# EAGLE board Copy of Super Hango (EAGLE 9.7.0)

Size 259.28 x 146.26 mm. Coordinates in mm from the lower left corner, seen from the top.
Outline: 0,0 259.28,0 259.28,146.26 0,146.26 0,0
Copper layers (1*16): Top 0.035mm / dielectric 1.5mm / Bottom 0.035mm
Design rules "default": minimum track width 6mil, minimum drill 0.35mm, track to track 6mil, track to pad 6mil, pad to pad 6mil, via to via 6mil, smd to smd 6mil, copper to edge 40mil, drill to drill 6mil, minimum pad ring 10mil, minimum via ring 8mil, stop-mask expansion 4mil, vias tented up to drill 0mil, thermal gap 10mil

## Footprints (pad centres in the part's own frame; a part is rotated, then mirrored left to right if it is on the bottom)
DIODE-AXIAL = drill 1: 1 -5.08,0; 2 5.08,0
DG01D = drill 1.118 pad 3.15 octagon: + 2.54,0; - -2.54,0
ARDUINO-UNO-R3-SHIELD = drill 1.016 pad 1.88: 3.3V 24.13,-2.54; 5V 24.13,0; A0 24.13,12.7; A1 24.13,15.24; A2 24.13,17.78; A3 24.13,20.32; A4 24.13,22.86; A5 24.13,25.4; AREF -24.13,-13.97; D2 -24.13,20.32; D3 -24.13,17.78; D4 -24.13,15.24; D5 -24.13,12.7; D6 -24.13,10.16; D7 -24.13,7.62; D8 -24.13,3.81; D9 -24.13,1.27; D10 -24.13,-1.27; D11 -24.13,-3.81; D12 -24.13,-6.35; D13 -24.13,-8.89; GND@0 24.13,2.54; GND@1 24.13,5.08; GND@2 -24.13,-11.43; IOREF 24.13,-7.62; NC 24.13,-10.16; RES 24.13,-5.08; RX -24.13,25.4; SCL -24.13,-19.05; SDA -24.13,-16.51; TX -24.13,22.86; VIN 24.13,7.62
DIP762W53P254L1969H508Q16B = drill 0.743 pad 1.343: 1 -3.81,8.89; 2 -3.81,6.35; 3 -3.81,3.81; 4 -3.81,1.27; 5 -3.81,-1.27; 6 -3.81,-3.81; 7 -3.81,-6.35; 8 -3.81,-8.89; 9 3.81,-8.89; 10 3.81,-6.35; 11 3.81,-3.81; 12 3.81,-1.27; 13 3.81,1.27; 14 3.81,3.81; 15 3.81,6.35; 16 3.81,8.89
DIP762W53P254L1969H508Q14B = drill 0.743 pad 1.343: 1 -3.81,7.62; 2 -3.81,5.08; 3 -3.81,2.54; 4 -3.81,0; 5 -3.81,-2.54; 6 -3.81,-5.08; 7 -3.81,-7.62; 8 3.81,-7.62; 9 3.81,-5.08; 10 3.81,-2.54; 11 3.81,0; 12 3.81,2.54; 13 3.81,5.08; 14 3.81,7.62
TSOP48 = drill 0.8: 1 -2.54,0; 2 0,0; 3 2.54,0

## Placement (x,y rotation side)
D1  DIODEDIODE-AXIAL  [DIODE-AXIAL]  173.71,82.94 0 top
D2  DIODEDIODE-AXIAL  [DIODE-AXIAL]  173.71,55 0 top
D3  DIODEDIODE-AXIAL  [DIODE-AXIAL]  171.17,80.4 180 top
D4  DIODEDIODE-AXIAL  [DIODE-AXIAL]  171.17,57.54 180 top
D5  DIODEDIODE-AXIAL  [DIODE-AXIAL]  209.27,80.4 180 top
D6  DIODEDIODE-AXIAL  [DIODE-AXIAL]  206.73,55 0 top
D8  DIODEDIODE-AXIAL  [DIODE-AXIAL]  209.27,57.54 180 top
D9  DIODEDIODE-AXIAL  [DIODE-AXIAL]  206.73,82.94 0 top
M1  MOTOR_DG01D  [DG01D]  124.93,74.3 0 top
M2  MOTOR_DG01D  [DG01D]  246.58,71.96 180 top
U1  ARDUINO-UNO-R3-SHIELD  [ARDUINO-UNO-R3-SHIELD]  47.88,60.54 270 top
U2  L293E  [DIP762W53P254L1969H508Q16B]  190.22,68.97 0 top
U3  74HC04_PDIP  [DIP762W53P254L1969H508Q14B]  190.22,37.22 0 top
U5  IR-RECEIVERTSOP48  [TSOP48]  214.35,130.04 0 top

## Library data of the parts
D1-D6 D8 D9 M1 M2 U1-U3 U5 = Tinkercad

## Nets
M1_+: D2.2 D4.1 M1.+ U2.6
M1_-: D1.2 D3.1 M1.- U2.3
M2_+: D6.1 D8.2 M2.+ U2.11
M2_-: D5.2 D9.1 M2.- U2.14
U1_5V: D3.2 D4.2 D6.2 D9.2 U1.5V U2.8 U2.16 U3.14 U5.3
U1_A0: U1.A0 U5.2
U1_D3: U1.D3 U2.15 U3.13
U1_D7: U1.D7 U2.2 U3.1
U1_D9: U1.D9 U2.9
U1_D10: U1.D10 U2.1
U1_GND: D1.1 D2.1 D5.1 D8.1 U1.GND@0 U1.GND@1 U1.GND@2 U2.4 U2.5 U2.12 U2.13 U3.7 U5.1
U2_2A: U2.7 U3.2
U2_3A: U2.10 U3.12

## Tracks (layer width: path | path; a pad name or v marks a point on that pad's centre or on a via)
M1_+  (3 unrouted)
M1_-  (3 unrouted)
M2_+  (3 unrouted)
M2_-  (3 unrouted)
U1_5V  (8 unrouted)
U1_A0  (1 unrouted)
U1_D3  (2 unrouted)
U1_D7  (2 unrouted)
U1_D9  (1 unrouted)
U1_D10  (1 unrouted)
U1_GND  (12 unrouted)
U2_2A  (1 unrouted)
U2_3A  (1 unrouted)